# EAGLE board board (EAGLE 9.6.2)
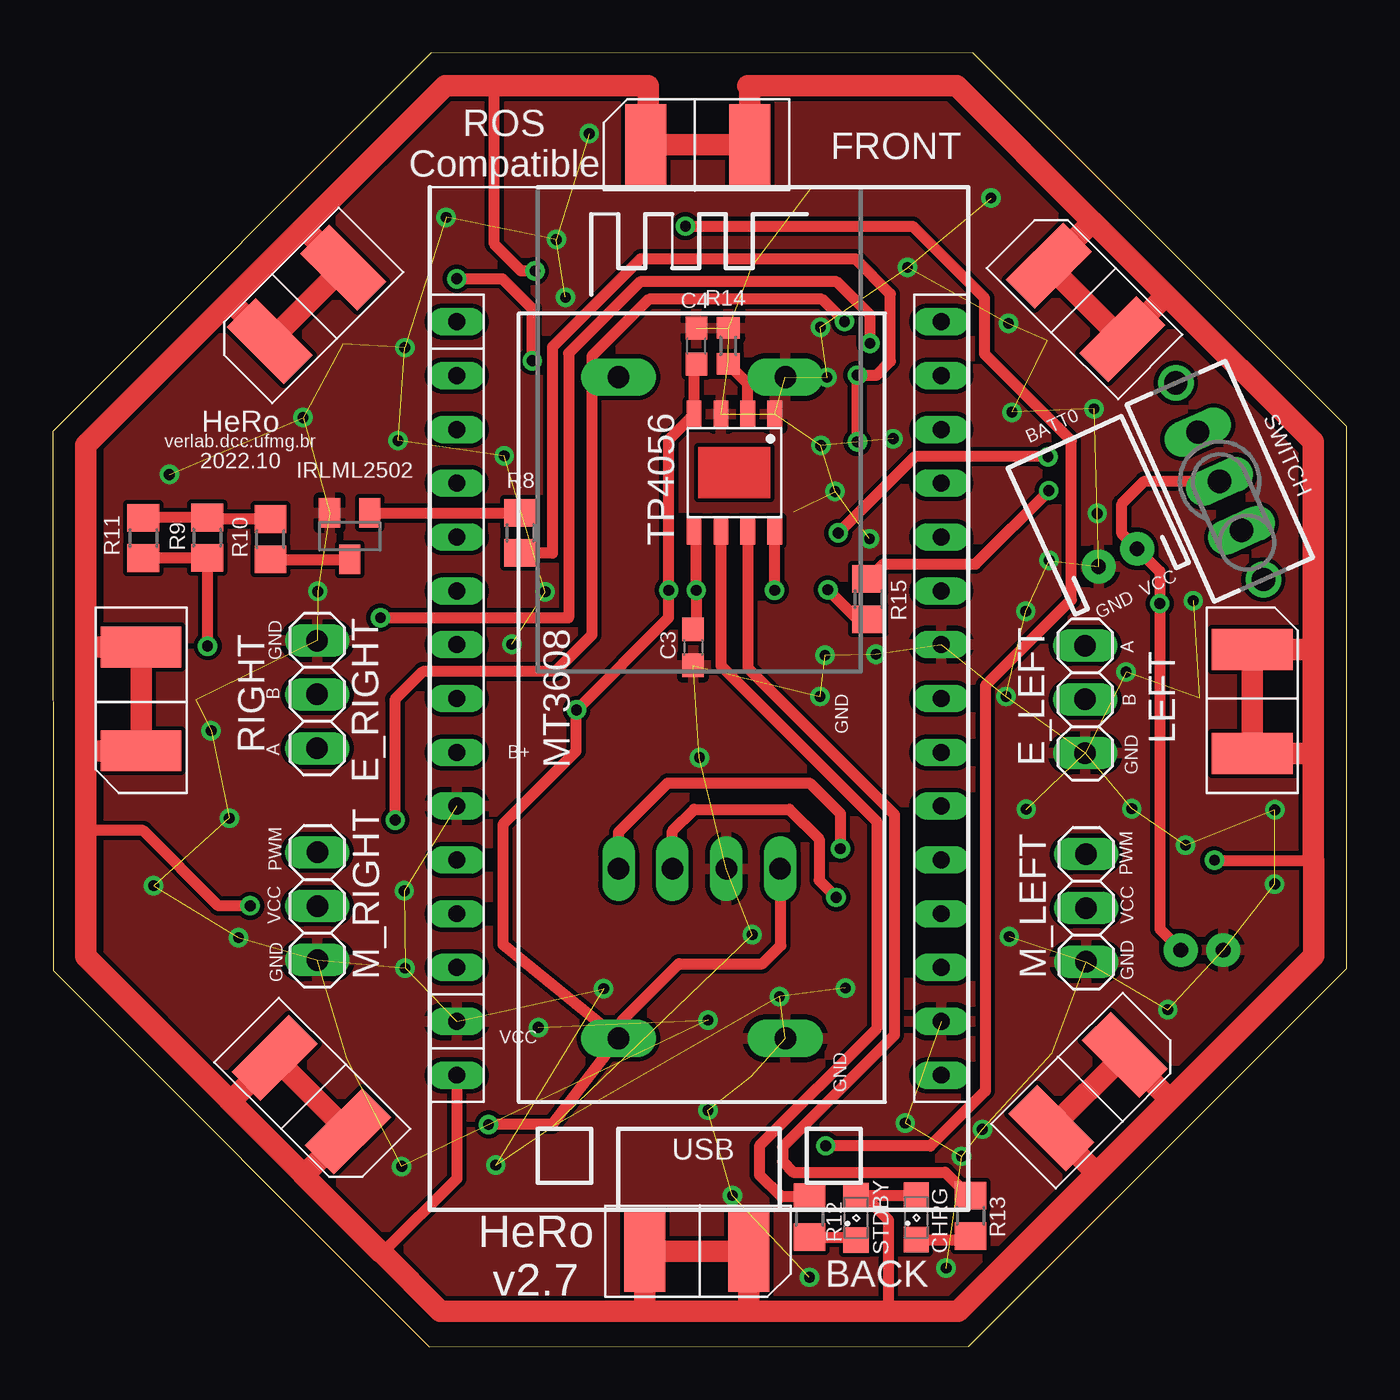
[diagram p0: board, top side]
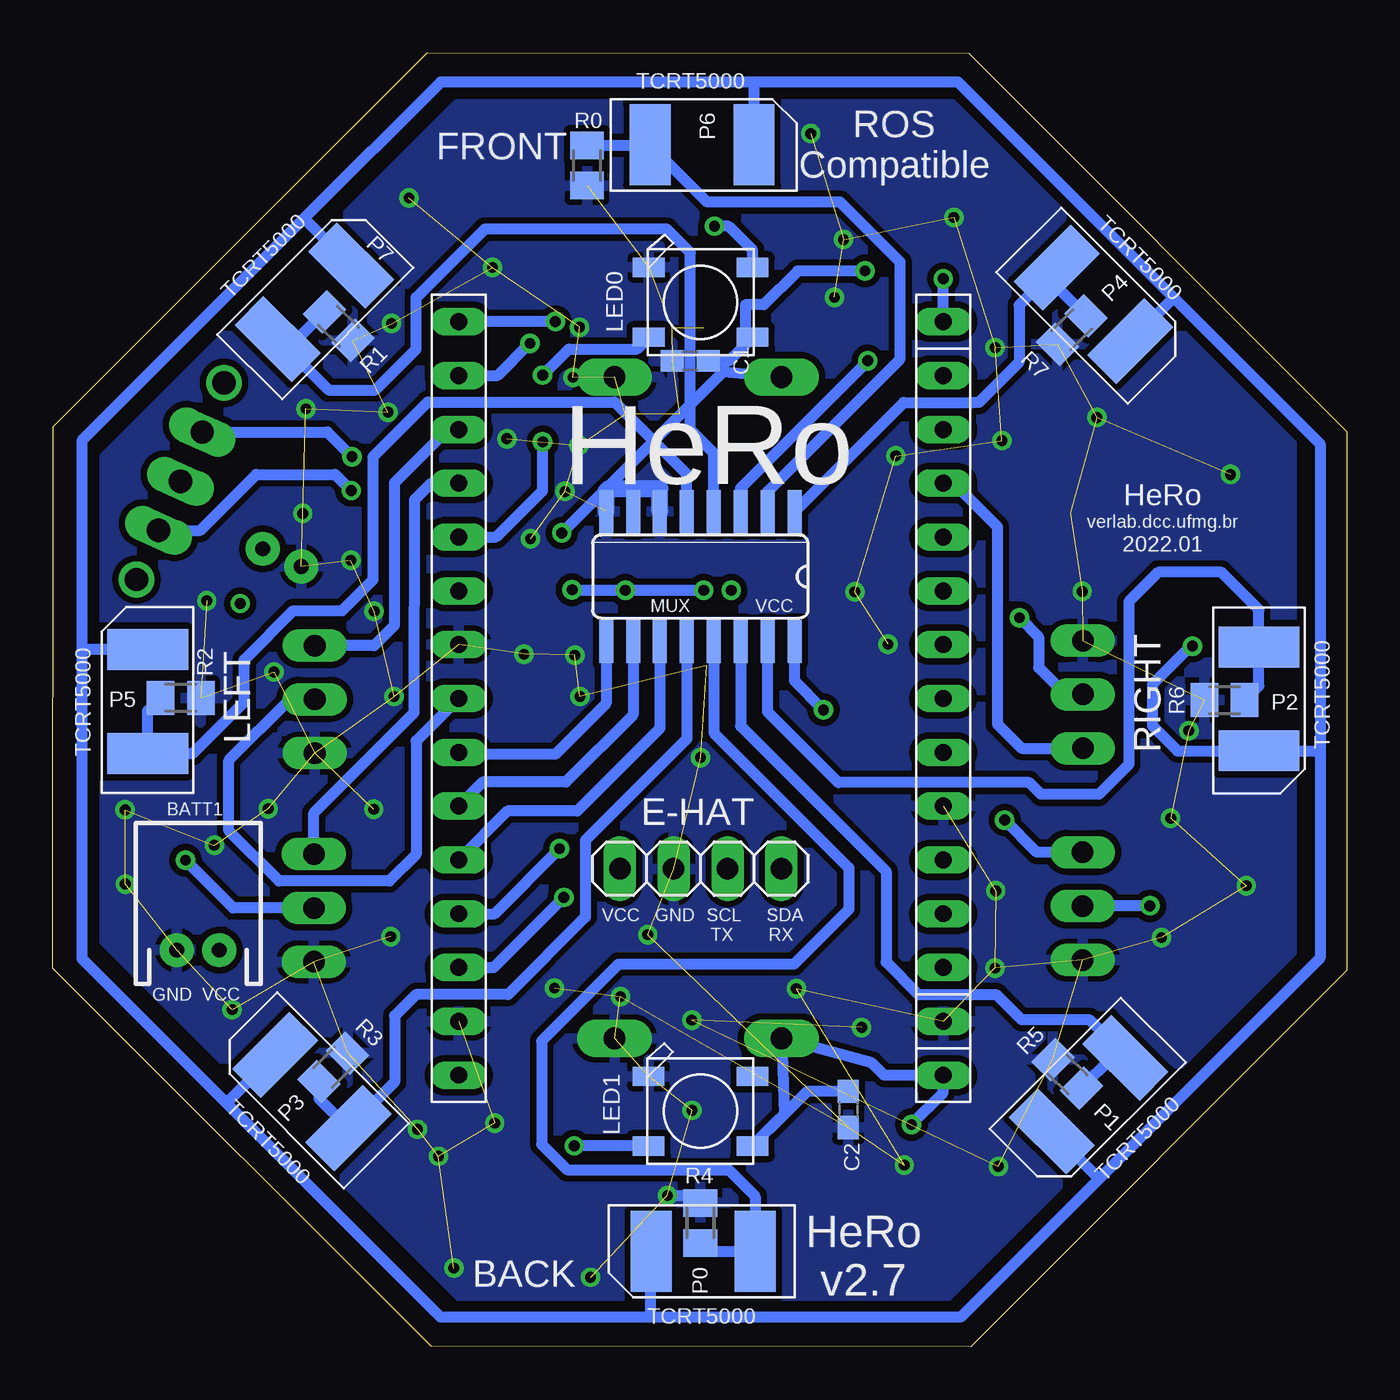
[diagram p1: board, bottom side, seen from below]

Size 61.06 x 61.06 mm. Coordinates in mm from the lower left corner, seen from the top.
Outline: 61.05,43.43 43.39,61.06 17.84,61.04 0,43.19 0,17.75 17.75,0 43.21,0 61.06,17.86 61.05,43.43
Copper layers (1*16): Top 0.035mm / dielectric 1.5mm / Bottom 0.035mm
Design rules "default": minimum track width 6mil, minimum drill 0.35mm, track to track 6mil, track to pad 6mil, pad to pad 6mil, via to via 6mil, smd to smd 6mil, copper to edge 40mil, drill to drill 6mil, minimum pad ring 10mil, minimum via ring 8mil, stop-mask expansion 4mil, vias tented up to drill 0mil, thermal gap 10mil
Net classes: 0 default: width 0.508 mm, drill 0.508 mm, clearance 0.203 mm; 1 gnd: width 0.508 mm, drill 0.508 mm, clearance 0.203 mm

## Footprints (pad centres in the part's own frame; a part is rotated, then mirrored left to right if it is on the bottom)
JST-2-PTH = drill 0.7 pad 1.6: 1 -1,0; 2 1,0
C0603 = smd 1.1 x 1: 1 -0.85,0; 2 0.85,0
SML0805 = smd 1.2 x 1.2: A 1.05,0; C -1.05,0
1X04 = drill 1.016 long: 1 -3.81,0; 2 -1.27,0; 3 1.27,0; 4 3.81,0
1X03 = drill 1.016 long: 1 -2.54,0; 2 0,0; 3 2.54,0
ESP12E_DEVKIT = drill 0.8 pad 1.27 long: 3V3@0 -11.43,-7.62; 3V3@1 11.43,5.08; 3V3@2 11.43,-17.78; AD0 -11.43,17.78; CLK -11.43,-2.54; CMD -11.43,2.54; D0 11.43,17.78; D1 11.43,15.24; D2 11.43,12.7; D3 11.43,10.16; D4 11.43,7.62; D5 11.43,0; D6 11.43,-2.54; D7 11.43,-5.08; D8 11.43,-7.62; EN -11.43,-10.16; GND@0 -11.43,-5.08; GND@1 -11.43,-15.24; GND@2 11.43,2.54; GND@3 11.43,-15.24; RST -11.43,-12.7; RSV@0 -11.43,15.24; RSV@1 -11.43,12.7; RX 11.43,-10.16; SD0 -11.43,0; SD1 -11.43,5.08; SD2 -11.43,7.62; SD3 -11.43,10.16; TX 11.43,-12.7; VIN -11.43,-17.78
SOT23 = smd 1 x 1.4: 1 -0.95,-1.1; 2 0.95,-1.1; 3 0,1.1
WS2812B = smd 1.5 x 0.9: 1-VDD 2.45,-1.65; 2-DOUT 2.45,1.65; 3-GND -2.45,1.65; 4-DIN -2.45,-1.65
MT3608 = drill 1.016 pad 1.778 long: 5V 3,12.573; B+ 34.211,12.573; B- 34.211,4.699; GND 3,4.699
SO16 = smd 0.66 x 2.032: 1 -4.445,-3.073; 2 -3.175,-3.073; 3 -1.905,-3.073; 4 -0.635,-3.073; 5 0.635,-3.073; 6 1.905,-3.073; 7 3.175,-3.073; 8 4.445,-3.073; 9 4.445,3.073; 10 3.175,3.073; 11 1.905,3.073; 12 0.635,3.073; 13 -0.635,3.073; 14 -1.905,3.073; 15 -3.175,3.073; 16 -4.445,3.073
TCRT5000 = smd 1.93 x 3.81 bottom: A -2.311,0; C 2.591,0 | smd 1.93 x 3.81: E 2.591,0; K -2.311,0
M0805 = smd 1.3 x 1.6: 1 -0.95,0; 2 0.95,0
R0805 = smd 1.3 x 1.5: 1 -0.95,0; 2 0.95,0
R0603 = smd 1 x 1.1: 1 -0.85,0; 2 0.85,0
HH3T90 = drill 1.1 pad 1.422 long: 1 -2.54,0; 2 0,0; 3 2.54,0 | drill 1.1 pad 1.676: M1 -5.08,0; M2 5.08,0
SOP-8 = smd 1.3 x 0.7: 1 -2.75,1.905; 2 -2.75,0.635; 3 -2.75,-0.635; 4 -2.75,-1.905; 5 2.75,-1.905; 6 2.75,-0.635; 7 2.75,0.635; 8 2.75,1.905

## Placement (x,y rotation side)
BATT0  [JST-2-PTH]  50.24,37.24 24.7 top
BATT1  [JST-2-PTH]  54.21,18.71 0 bottom
C1  0.10 nF  [C0603]  30.99,46.52 180 bottom
C2  0.10 nF  [C0603]  23.53,11.19 270 bottom
C3  10 uF  [C0603]  30.2,33 270 top
C4  10 uF  [C0603]  30.36,47.22 90 top
CHRG  RED  [SML0805]  40.73,6.09 90 top
E-HAT  [1X04]  30.5,22.55 180 bottom
E_LEFT  [1X03]  48.71,30.55 90 top
E_RIGHT  [1X03]  12.46,30.78 270 top
ESP-12E  ESP12E_DEVKIT  [ESP12E_DEVKIT]  30.48,30.59 0 top
IRLML2502  [SOT23]  14,38.25 180 top
LED0  WS2812B5050  [WS2812B]  30.5,49.29 0 bottom
LED1  WS2812B5050  [WS2812B]  30.51,11.11 0 bottom
M_LEFT  [1X03]  48.75,20.7 90 top
M_RIGHT  [1X03]  12.47,20.79 90 top
MT3608  [MT3608]  39.25,11.55 90 top
MUX  4051D  [SO16]  30.51,36.34 180 bottom
P0  [TCRT5000]  30.51,4.5 0 bottom
P1  [TCRT5000]  12.29,11.8 45 bottom
P2  [TCRT5000]  4.16,30.43 90 bottom
P3  [TCRT5000]  48.94,12.14 315 bottom
P4  [TCRT5000]  11.87,49.09 135 bottom
P5  [TCRT5000]  56.59,30.58 270 bottom
P6  [TCRT5000]  30.29,56.72 180 bottom
P7  [TCRT5000]  48.63,49.39 225 bottom
R0  4k7  [M0805]  35.86,55.75 270 bottom
R1  4k7  [M0805]  47.58,48.16 315 bottom
R2  4k7  [M0805]  55.03,30.62 0 bottom
R3  4k7  [M0805]  47.82,13.18 45 bottom
R4  4k7  [M0805]  30.52,5.83 90 bottom
R5  4k7  [M0805]  13.21,12.87 135 bottom
R6  4k7  [M0805]  5.78,30.51 180 bottom
R7  4k7  [M0805]  12.99,47.98 225 bottom
R8  4k7  [R0805]  22.05,38.41 270 top
R9  0R  [R0805]  7.27,38.18 270 top
R10  18R  [R0805]  10.26,38.11 90 top
R11  NM  [R0805]  4.26,38.17 270 top
R12  103  [R0805]  35.69,6.11 270 top
R13  102  [R0805]  43.29,6.17 270 top
R14  122  [R0603]  31.86,47.23 270 top
R15  0R  [R0805]  38.47,35.28 270 top
STDBY  GREEN  [SML0805]  37.89,6.08 90 top
SWITCH  SS12F2356  [HH3T90]  55.05,40.84 114 top
TP4056  TP4056  [SOP-8]  32.15,41.25 270 top

## Library data of the parts
BATT0 BATT1 = SparkFun-Connectors; PROD_ID: CONN-09863; SKU: PRT-09914
C1 C2 IRLML2502 LED0 LED1 R0 R1-R7 = adafruit
C3 C4 R12-R15 = resistor
CHRG STDBY = led
E-HAT E_LEFT E_RIGHT M_LEFT M_RIGHT = pinhead
ESP-12E = ESP12E_DEVKIT
MT3608 = stepup
MUX = 40xx
P0 P1-P7 = tcrt5000
R8-R11 = resistor; SPICEPREFIX: R
SWITCH = switch
TP4056 = TP4056; SPICEPREFIX: X

## Nets
AD0: ESP-12E.AD0 MUX.3
B+: MT3608.B+ SWITCH.3
CHRG: R13.1 TP4056.7
E_LEFT_A: E_LEFT.3 ESP-12E.D2
E_LEFT_B: E_LEFT.2 ESP-12E.D5
E_RIGHT_A: E_RIGHT.3 ESP-12E.SD3
E_RIGHT_B: E_RIGHT.2 ESP-12E.D1
EM: P0.K P1.K P2.K P3.K P4.K P5.K P6.K P7.K R9.2 R11.2
EM_ENABLE: ESP-12E.D4 LED0.4-DIN R8.2
GND: BATT0.1 BATT1.1 C1.2 C2.2 C3.2 C4.2 E-HAT.3 E_LEFT.1 E_RIGHT.1 ESP-12E.GND@0 ESP-12E.GND@1 ESP-12E.GND@2 ESP-12E.GND@3 IRLML2502.2 LED0.3-GND LED1.3-GND M_LEFT.1 M_RIGHT.1 MT3608.B- MT3608.GND MUX.6 MUX.8 R0.2 R1.2 R2.2 R3.2 R4.2 R5.2 R6.2 R7.2 R14.1 TP4056.1 TP4056.3
M_LEFT_PWM: ESP-12E.D3 M_LEFT.3
M_RIGHT_PWM: ESP-12E.D0 M_RIGHT.3
MUX_A: ESP-12E.D8 MUX.11
MUX_B: ESP-12E.D7 MUX.10
MUX_C: ESP-12E.D6 MUX.9
MUX_X0: MUX.13 P0.E R4.1
MUX_X1: MUX.14 P1.E R5.1
MUX_X2: MUX.15 P2.E R6.1
MUX_X3: MUX.12 P3.E R3.1
MUX_X4: MUX.1 P4.E R7.1
MUX_X5: MUX.5 P5.E R2.1
MUX_X6: MUX.2 P6.E R0.1
MUX_X7: MUX.4 P7.E R1.1
N$2: BATT0.2 BATT1.2 SWITCH.2
N$3: IRLML2502.3 R10.1
N$4: R9.1 R10.2 R11.1
N$5: CHRG.C R13.2
N$6: IRLML2502.1 R8.1
N$8: R12.2 STDBY.C
PROG: R14.2 TP4056.2
SCL_TX: E-HAT.2 ESP-12E.TX
SDA_RX: E-HAT.1 ESP-12E.RX
STDBY: R12.1 TP4056.6
TP_B+: C3.1 R15.2 TP4056.5 TP4056.8
TP_BS: R15.1 SWITCH.1
VCC: C1.1 C2.1 C4.1 CHRG.A E-HAT.4 ESP-12E.VIN LED0.1-VDD LED1.1-VDD M_LEFT.2 M_RIGHT.2 MT3608.5V MUX.16 P0.A P0.C P1.A P1.C P2.A P2.C P3.A P3.C P4.A P4.C P5.A P5.C P6.A P6.C P7.A P7.C STDBY.A TP4056.4
VEE: MUX.7
WS_OUT: LED0.2-DOUT LED1.4-DIN

## Tracks (layer width: path | path; a pad name or v marks a point on that pad's centre or on a via)
AD0  (via drill 0.51 pad 0.51)
  Top 0.508: v19.05,50.4 21.2,50.4 22.61,48.99 v22.61,46.53
  Bottom 0.508: MUX.3 28.61,40.52 22.61,46.51 v22.61,46.53 | ESP-12E.AD0 v19.05,50.4
B+  (via drill 0.51)
  Top 0.508: v46.95,42 46.94,42.01 40.66,42.01 v37.05,38.4
  Bottom 0.508: SWITCH.3 48.11,43.16 v46.95,42 | v37.05,38.4 29.44,46.01 MT3608.B+
CHRG
  Top 0.508: TP4056.7 32.79,32.02 39.7,25.1 39.7,14.7 34.42,9.42 34.42,8.73 34.93,8.23 42.09,8.23 43.2,7.12 R13.1
E_LEFT_A
  Bottom 0.508: ESP-12E.D2 42.43,43.29 44.95,40.76 44.95,34.04 45.91,33.09 E_LEFT.3
E_LEFT_B
  Bottom 0.508: ESP-12E.D5 43.92,28.58 43.92,23.23 45.18,21.97 50.38,21.97 52.75,24.34 52.75,27.68 49.88,30.55 E_LEFT.2
E_RIGHT_A
  Bottom 0.508: 18.54,40.75 16.49,38.7 16.49,29.38 15.35,28.24 E_RIGHT.3
  Bottom 0.813: ESP-12E.SD3 18.54,40.75
E_RIGHT_B  (via drill 0.51 pad 0.51)
  Top 0.508: v15.45,34.4 | v15.45,34.4 24.33,34.4 24.33,46.89 27.7,50.26 36.97,50.26 38.53,48.7 38.53,47.37 v38.55,47.35
  Bottom 0.508: E_RIGHT.2 13.28,30.78 14.55,32.05 14.55,33.5 v15.45,34.4 | ESP-12E.D1 40.07,45.83 v38.55,47.35
EM  (via drill 0.51)
  Top 0.508: v7.29,33.06 7.29,37.21 R9.2 7.26,37.22 R11.2
  Bottom 0.508: 49.2,53.25 42.77,59.68 27.95,59.68 | 49.2,53.25 59.69,42.76 59.69,32.89 | 8.18,49.51 1.27,42.6 1.27,31.74 1.27,28.06 | 8.18,49.51 18.35,59.68 27.95,59.68 | v7.29,33.06 7.37,33.06 9.17,31.26 9.17,29.29 7.99,28.11 P2.K 1.33,28.12 1.27,28.06 | 59.69,32.89 59.69,18.31 52.83,11.45 | 52.83,11.45 42.77,1.39 32.88,1.39 | 32.88,1.39 18.23,1.39 11.68,7.95 | 11.68,7.95 1.27,18.35 1.27,28.06 | P1.K 11.7,7.95 11.68,7.95 | P0.K 32.88,4.44 32.88,1.39 | P3.K 52.83,11.52 52.83,11.45 | P5.K 59.69,32.9 59.69,32.89 | P4.K 8.18,49.51 | P7.K 49.2,53.23 49.2,53.25 | P6.K 27.98,59.65 27.95,59.68
EM_ENABLE  (via drill 0.51 pad 0.51)
  Top 0.508: v37.95,42.7 v37.95,45.85 38.87,45.85 39.52,46.5 39.52,49.68 37.85,51.34 27.73,51.34 23.58,47.19 23.58,37.45 R8.2
  Bottom 0.508: ESP-12E.D4 40.14,38.21 37.95,40.4 v37.95,42.7 | v37.95,45.85 36.72,47.09 33.5,47.09 LED0.4-DIN
GND  (via drill 0.51)  (91 unrouted)
  Bottom 0.508: v32.06,7.13 30.87,7.13 R4.2
  Bottom 0.813: MUX.6 32.42,40.48 34.85,40.48 34.96,40.37 34.96,39.43 MUX.8
  other vias: 34.28,16.52 32.99,19.44 40.21,10.55 42.87,8.98 43.85,10.25 25.98,16.89 38.83,32.68 45.25,44.1 36.19,30.68 8.75,19.3 16.57,21.51 7.46,29.07 8.32,24.94 12.49,35.64 16.28,42.76 16.6,47.15 50.63,31.84 50.9,25.39 45.92,25.36 57.65,25.33 36.23,42.53 36.52,45.74 23.75,52.25 45.08,48.29 44.26,54.21 18.55,53.3 47,37.11 40.32,50.93 36.43,32.63 11.8,43.85 30.5,27.8 16.61,17.86 25.3,57.25 5.49,41.16 52.6,15.9 57.64,21.83 39.64,42.85 49.12,44.26 36.21,48.11 45.12,19.35 21.29,42.04 53.44,23.66 20.89,8.56 4.75,21.75 24.18,49.52 36.9,40.36 21.65,33.15 44.96,30.68 45.9,34.7 37.39,16.92 30.9,11.15 22.9,15.06 30.91,15.41 16.45,8.5 53.8,35.2 23.22,35.62 35.69,3.27 38.52,38.13 49.27,39.32 42.14,3.7
  pour Top: 18.81,2.42 41.95,2.42 58.63,19.1 58.63,41.98 41.95,58.66 18.66,58.66 2.62,42.62 2.62,18.6
  pour Bottom (isolate 0.305): 18.82,2.39 41.91,2.39 58.62,19.1 58.62,42 41.99,58.63 18.62,58.63 2.61,42.62 2.61,18.6
M_LEFT_PWM
  Bottom 0.508: ESP-12E.D3 43.21,40.75 43.99,39.97 44.02,29.92 48.75,25.19 M_LEFT.3
M_RIGHT_PWM  (via drill 0.51 pad 0.51)
  Top 0.508: v37.35,48.38 36.3,49.44 28.12,49.44 25.43,46.75 25.43,33.59 23.7,31.86 17.45,31.86 16.13,30.54 16.15,30.52 v16.15,24.85
  Bottom 0.508: v37.35,48.38 v37.36,48.37 ESP-12E.D0 | M_RIGHT.3 14.63,23.33 v16.15,24.85
MUX_A
  Bottom 0.508: MUX.11 32.42,29.18 36.32,25.27 39.61,25.27 ESP-12E.D8
MUX_B
  Bottom 0.508: ESP-12E.D7 40.78,26.64 36.86,26.64 33.69,29.81 MUX.10
MUX_C
  Bottom 0.508: MUX.9 34.96,30.36 37.36,27.95 41.82,27.95
  Bottom 0.813: 41.82,27.95 ESP-12E.D6
MUX_X0
  Bottom 0.508: MUX.13 29.88,28.96 23.5,22.59 23.5,20.64 26.08,18.06 34.37,18.06 38.01,14.42 38.01,9.56 36.79,8.34 29.18,8.34 27.92,7.08 P0.E 30.14,4.5 R4.1
MUX_X1
  Bottom 0.508: MUX.14 28.61,29.29 21.75,22.43 21.75,18.14 20.23,16.62 16.56,16.62 15.37,15.43 12.17,15.43 10.45,13.71 P1.E 11.11,13.63 R5.1
MUX_X2
  Bottom 0.508: MUX.15 27.34,29.96 24,26.62 14.99,26.62 14.43,26.06 11.71,26.06 10.29,27.48 10.29,35.16 8.9,36.55 5.92,36.55 4.16,34.79 P2.E 4.16,31.19 R6.1
MUX_X3
  Bottom 0.508: MUX.12 31.15,28.68 35.93,23.9 35.93,20.28 39.59,16.62 43.93,16.62 44.93,15.61 44.93,12.49 P3.E 48.5,11.69 R3.1
MUX_X4
  Bottom 0.508: MUX.1 20.92,44.56 17.59,44.56 17.37,44.56 15.47,46.46 15.47,49.15 P4.E 13.7,50.03 R7.1
MUX_X5
  Bottom 0.508: MUX.5 31.15,41.18 34.55,44.59 43.36,44.59 45.95,42 45.95,36.2 47.42,34.73 49.72,34.73 52.04,32.41 52.04,30.42 54.47,27.99 P5.E 56.59,30.01 R2.1
MUX_X6
  Bottom 0.508: MUX.2 27.34,40.37 21.09,46.61 21.09,51.19 23.92,54.01 30.18,54.01 P6.E 32.91,56.7 R0.1
MUX_X7
  Bottom 0.508: MUX.4 29.88,42.18 30.98,43.28 30.98,51.63 32.11,52.75 40.68,52.75 43.92,49.51 43.92,47.07 45.84,45.15 48.05,45.15 P7.E 49.53,47.55 R1.1
N$2  (via drill 0.51)
  Top 0.508: SWITCH.2 51.49,40.84 50.44,39.79 50.44,38.37 BATT0.2 52.22,36.58 v52.22,35.07 52.22,19.7 BATT1.2
N$3
  Top 0.508: R10.1 IRLML2502.3
N$4
  Top 0.508: R10.2 7.35,39.06 R9.1 4.27,39.13 R11.1
N$5
  Top 0.508: CHRG.C 43.11,5.04 R13.2
N$6
  Top 0.508: IRLML2502.1 R8.1
N$8
  Top 0.508: R12.2 37.76,5.16 STDBY.C
PROG
  Top 0.508: TP4056.2 32.79,45.46 R14.2
SCL_TX  (via drill 0.51)
  Top 0.508: E-HAT.2 29.23,24.33 30.25,25.35 34.75,25.35 36.15,23.95 36.15,22 v36.95,21.2
  Bottom 0.508: ESP-12E.TX 40.26,17.89 v36.95,21.2
SDA_RX  (via drill 0.51)
  Top 0.508: E-HAT.1 26.69,24.29 29,26.6 35.7,26.6 37.15,25.15 v37.15,23.5
  Bottom 0.508: ESP-12E.RX 40.22,20.43 v37.15,23.5
STDBY
  Top 0.508: TP4056.6 31.52,32.14 38.86,24.79 38.86,15 33.33,9.47 33.33,8.1 34.37,7.06 R12.1
TP_B+  (via drill 0.51 pad 0.51)
  Top 0.508: TP4056.5 30.35,38.4 v30.35,35.7 30.35,34 C3.1 | v34.05,35.7 TP4056.8 | R15.2 37.95,34.33 v36.56,35.72
  Bottom 0.508: v30.35,35.7 v34.05,35.7 36.54,35.7 v36.56,35.72
TP_BS  (via drill 0.51)
  Top 0.508: R15.1 39.17,36.93 43.53,36.93 46.98,40.38 v46.98,40.4
  Bottom 0.508: SWITCH.1 54.11,38.52 51.47,41.16 47.74,41.16 v46.98,40.4
VCC  (via drill 0.51, 0.51 pad 0.51)
  Top 0.508: ESP-12E.VIN 19.05,7.92 15.55,4.42 15.54,4.42 15.5,4.42 | 34.34,22.52 34.34,18.93 33.47,18.06 29.53,18.06 26.86,15.39 MT3608.5V | v9.3,20.8 7.8,20.8 4.25,24.35 1.55,24.35 | C4.1 30.25,46.26 TP4056.4 29.05,42.81 v29.05,35.7 29.05,34.4 v24.7,30.05 24.69,30.04 24.69,28.1 21.23,24.64 21.23,18.97 MT3608.5V | 20.82,59.51 20.82,52.04 22.09,50.77 v22.74,50.77 | v54.8,22.95 59.35,22.95 | 59.35,22.95 59.48,22.95 | 59.35,22.95 59.46,22.84 | MT3608.5V 23.55,10.48 v20.55,10.48 | CHRG.A 40.72,7.13 STDBY.A 38.26,7.13 39.41,5.98 39.41,1.67
  Top 0.813: 34.34,22.52 E-HAT.4
  Top 1.016: 48.95,52.98 P7.A P7.C 52.48,49.58 52.48,49.68 | 48.95,52.98 49.07,53.1 52.48,49.68 | 48.95,52.98 48.95,53.2 42.64,59.51 32.77,59.51 32.88,59.4 P6.C P6.A 28.09,56.84 28.09,59.51 20.82,59.51 18.51,59.51 11.95,52.95 | 59.46,32.89 59.46,42.7 52.48,49.68 | 59.46,32.89 59.46,28.01 | 59.46,28.01 59.46,22.84 | 59.48,22.95 59.48,18.44 52.69,11.65 | 59.46,28.01 59.45,27.99 P5.C P5.A 59.46,32.9 59.46,32.89 | 52.69,11.65 49.09,8.05 | 49.09,8.05 42.71,1.67 39.41,1.67 32.7,1.67 | 32.7,1.67 27.82,1.67 | 27.82,1.67 18.28,1.67 15.54,4.42 | 52.69,11.65 52.69,11.67 P3.A P3.C 49.09,8.34 49.09,8.05 | 32.7,1.67 32.82,1.79 P0.A P0.C 27.92,1.77 27.82,1.67 | 15.5,4.42 11.77,8.15 11.79,8.15 | 11.79,8.15 8.3,11.64 8.33,11.64 | 8.33,11.64 1.55,18.41 1.55,24.35 1.55,28.12 | 8.33,11.64 8.46,11.64 P1.C P1.A 11.9,8.15 11.79,8.15 | 1.55,28.12 1.55,33.23 | 1.55,33.23 1.55,42.55 8.31,49.31 | 1.55,28.12 P2.A P2.C 1.76,33.02 1.55,33.23 | 8.31,49.31 11.95,52.95 | 8.31,49.31 8.38,49.31 P4.A P4.C 11.95,52.68 11.95,52.95
  Bottom 0.508: C1.1 29.16,46.52 LED0.1-VDD 28.39,47.98 28.39,49.17 27.52,49.17 25.92,50.77 v22.74,50.77 | M_LEFT.2 52.55,20.7 v54.8,22.95 | v24.7,30.05 26.07,31.41 MUX.16 | v9.3,20.8 12.46,20.8 M_RIGHT.2 | v20.55,10.48 19.05,11.98 ESP-12E.VIN 21.84,12.81 22.42,13.39 MT3608.5V 26.55,10.97 LED1.1-VDD 25.48,12.04 C2.1
WS_OUT  (via drill 0.51, 0.51 pad 0.51)
  Top 0.508: v36.46,9.47 41.4,9.47 44,12.07 44,31.2 48.05,35.25 48.05,42.75 43.96,46.85 43.96,49.48 40.56,52.88 v29.84,52.88
  Bottom 0.508: LED1.4-DIN v36.45,9.46 v36.46,9.47 | LED0.2-DOUT 28.05,51.75 29.18,52.88 v29.84,52.88

## Text on the board
tPlace: verlab.dcc.ufmg.br
bPlace: HeRo | verlab.dcc.ufmg.br
tNames: ROS / Compatible | FRONT | HeRo | 2022.10 | RIGHT | GND VCC | A | LEFT | GND | B | B | GND | A | B+ | GND | PWM | PWM | VCC | VCC | GND | GND | VCC | GND | USB | HeRo / v2.7 | BACK
bNames: TCRT5000 | ROS / Compatible | FRONT | TCRT5000 | TCRT5000 | HeRo | 2022.01 | MUX VCC | RIGHT | TCRT5000 | LEFT | TCRT5000 | SCL SDA / TX RX | VCC GND | GND VCC | TCRT5000 | TCRT5000 | HeRo / v2.7 | BACK | TCRT5000
tValues: RIGHT